# Altium PCB hazi_kiindulas.PcbDoc
Units mil, origin at the board's own origin, x right, y up, seen from the top; angles counter-clockwise.
Board outline 3550 x 2716.54 mil, 2 copper layers (Top Layer, Bottom Layer); 75 components, 66 nets, 307 pads, 24 vias.
Unrouted connection lines stored in the file: 1.
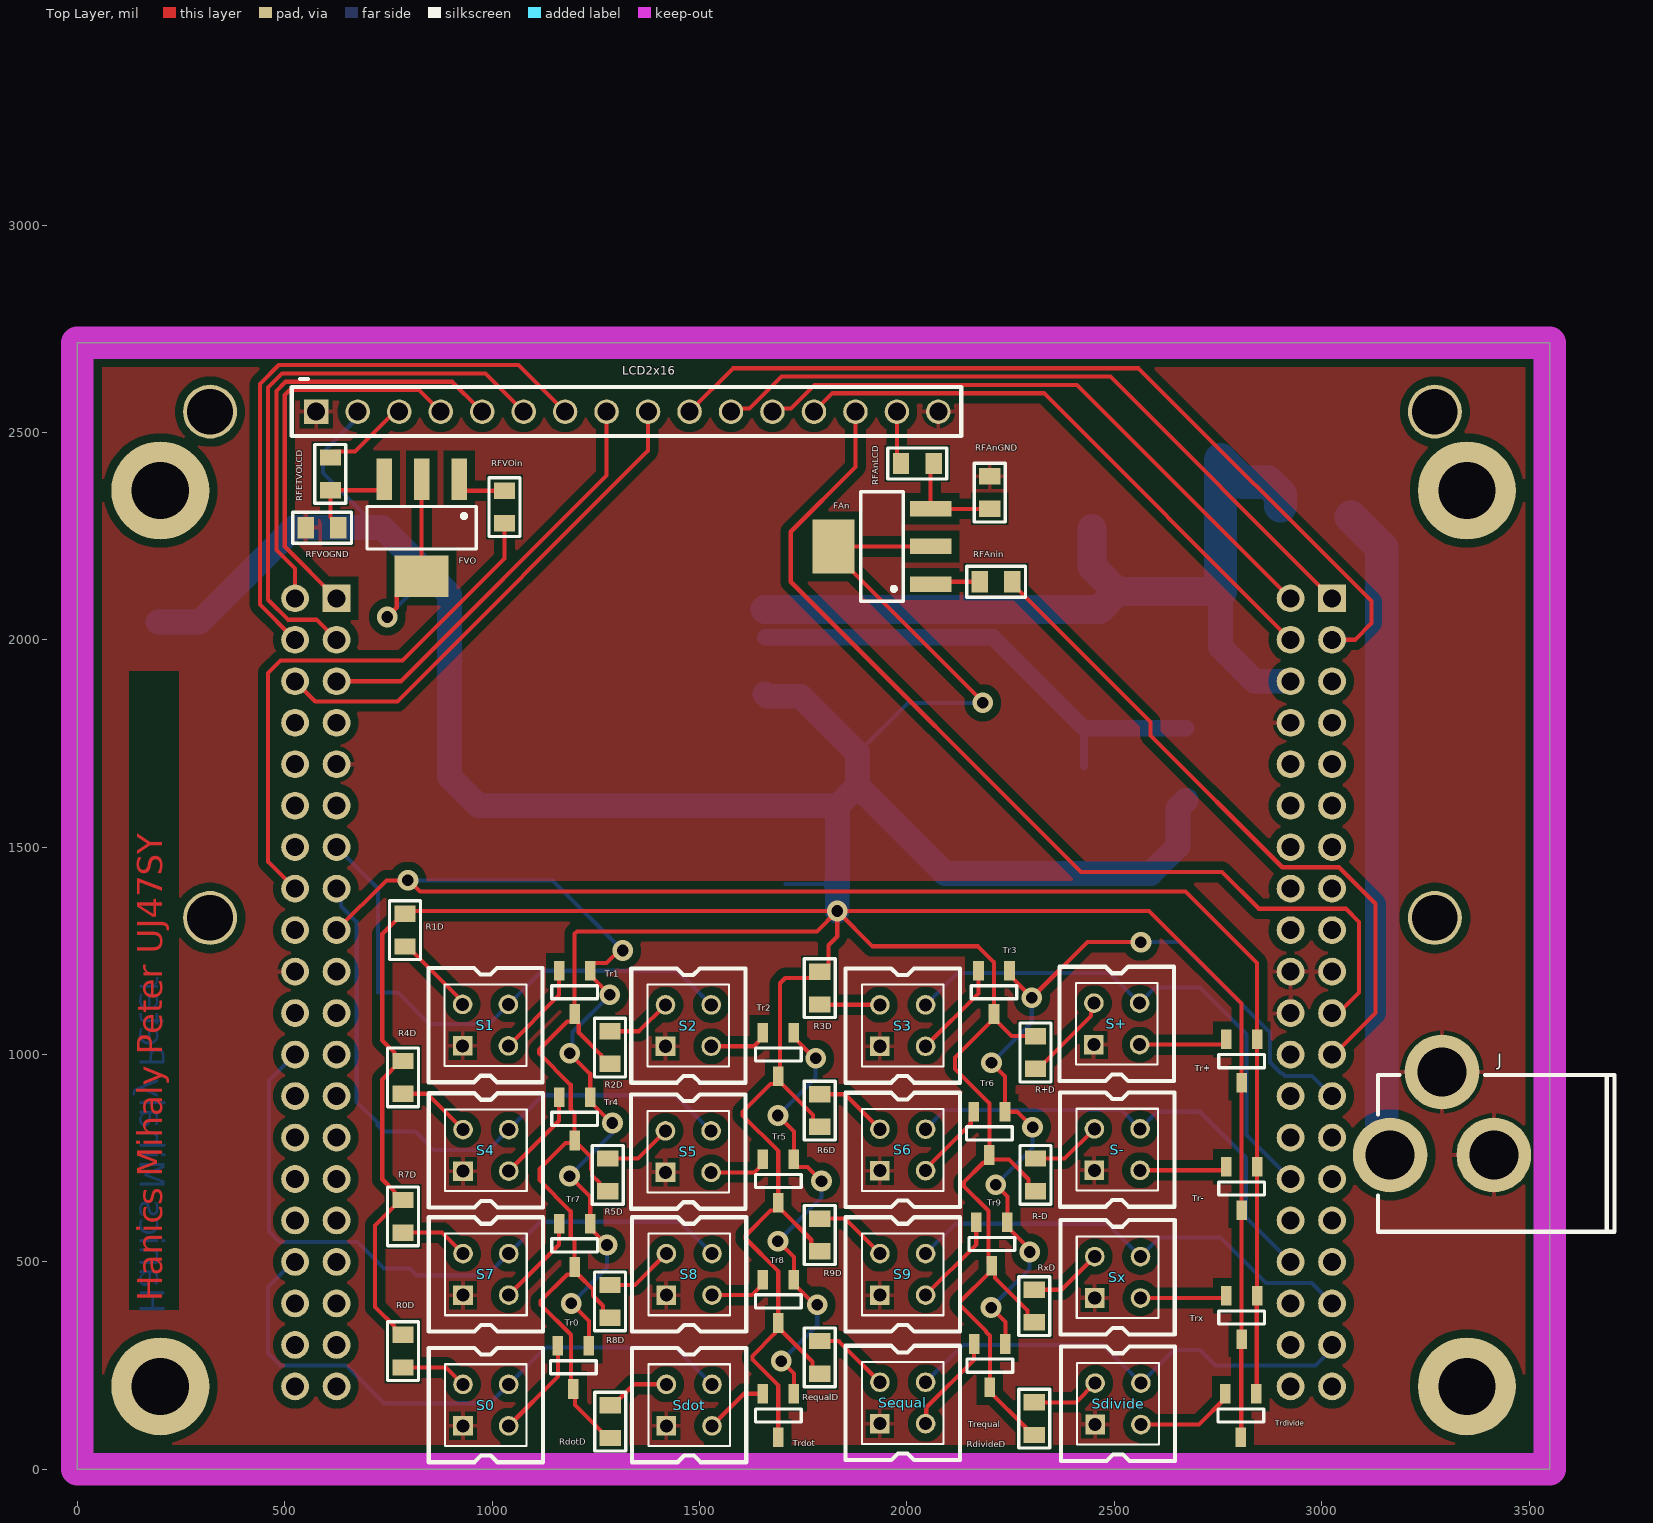
[diagram p0: Top Layer view]
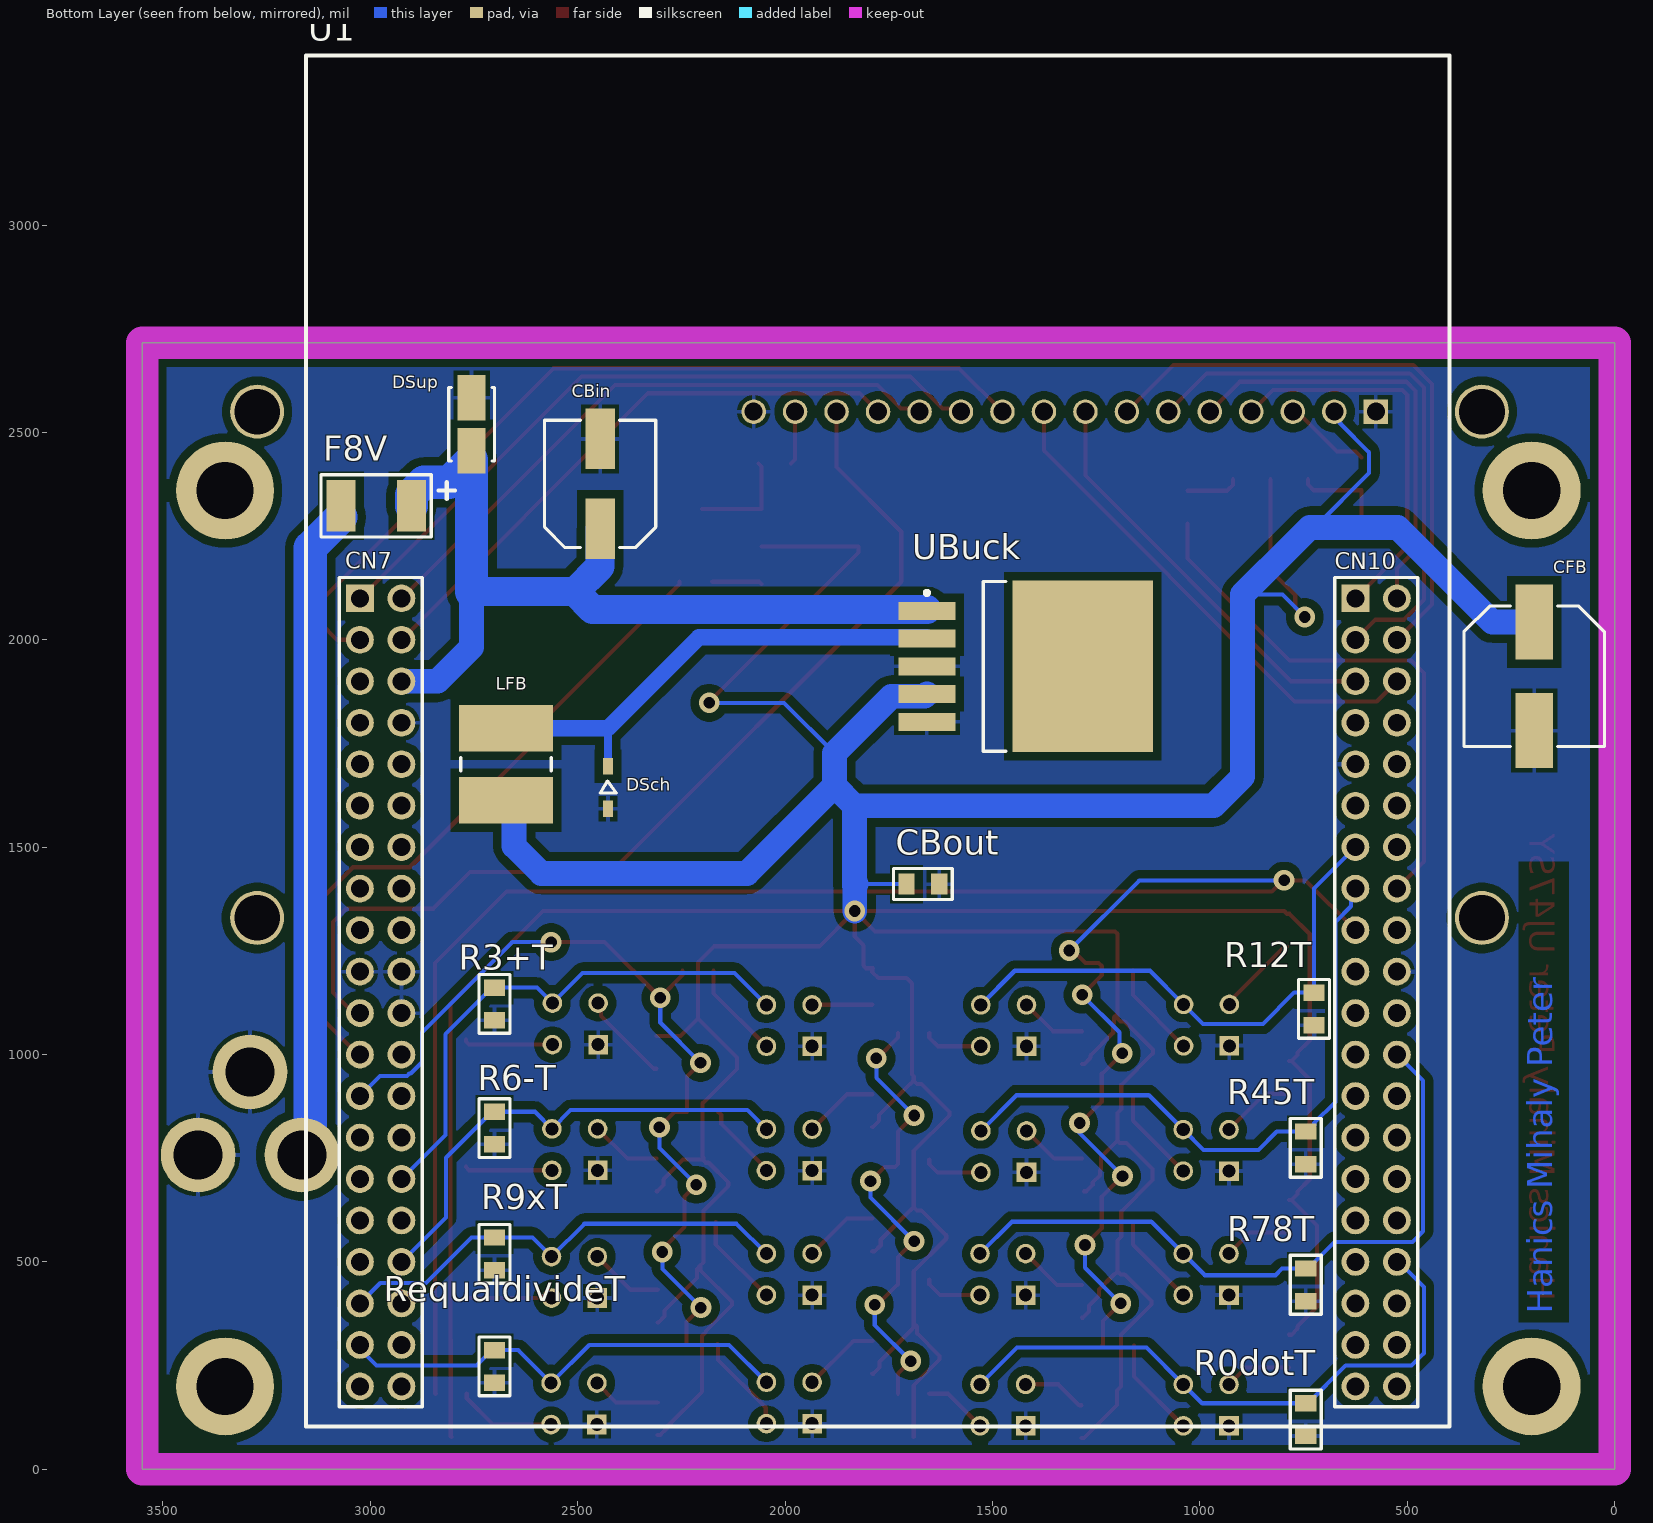
[diagram p1: Bottom Layer view, seen from below]
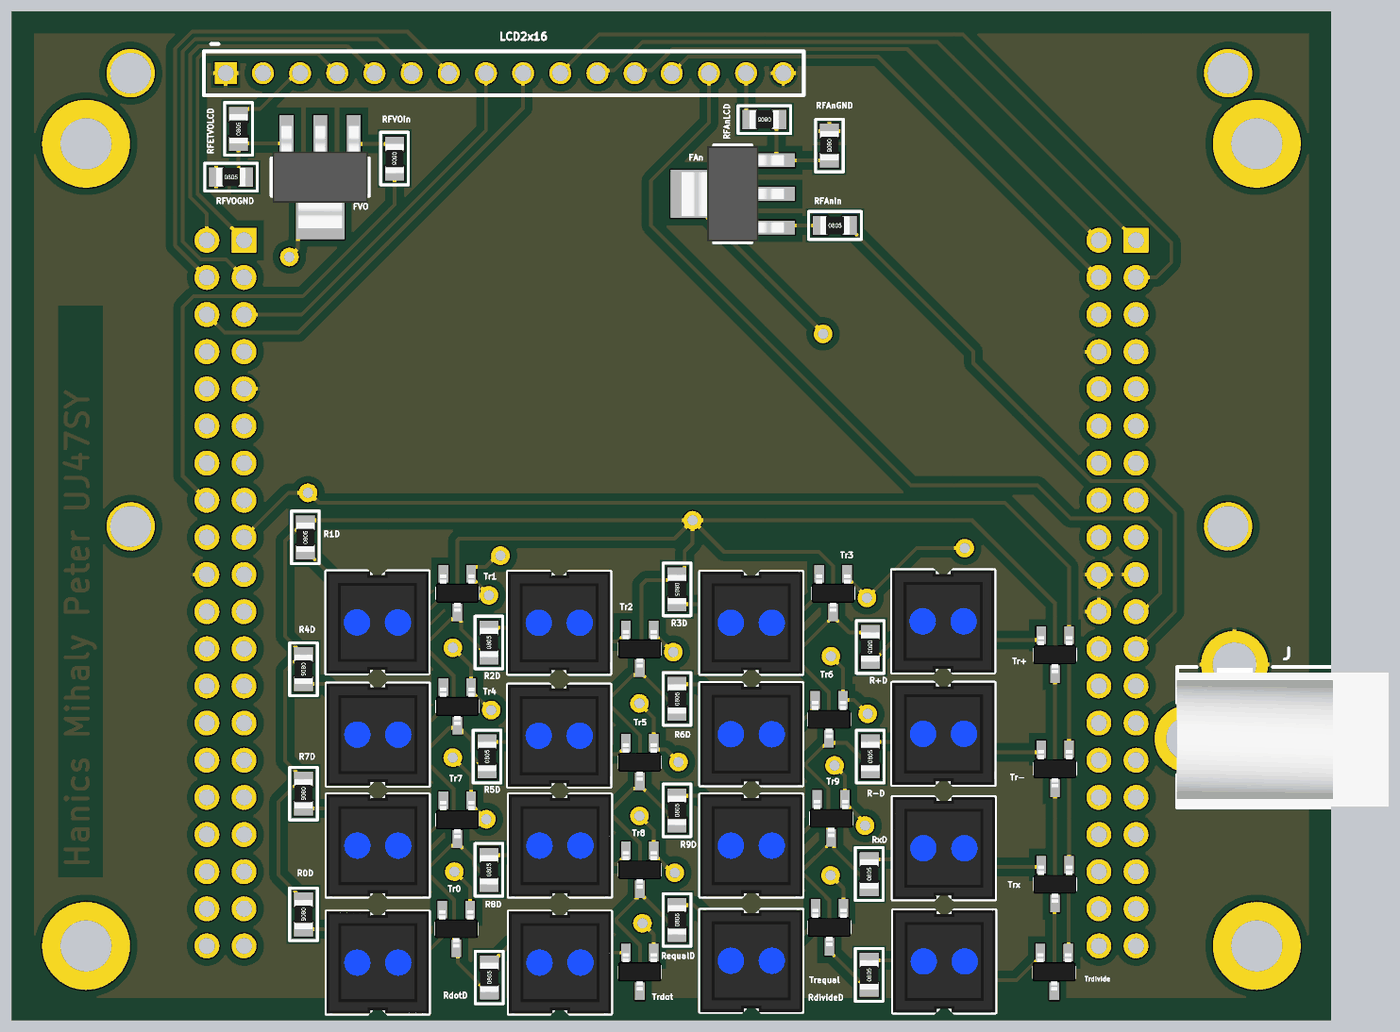
[diagram p2: 3D render of the assembled board from above, using the file's embedded part models]
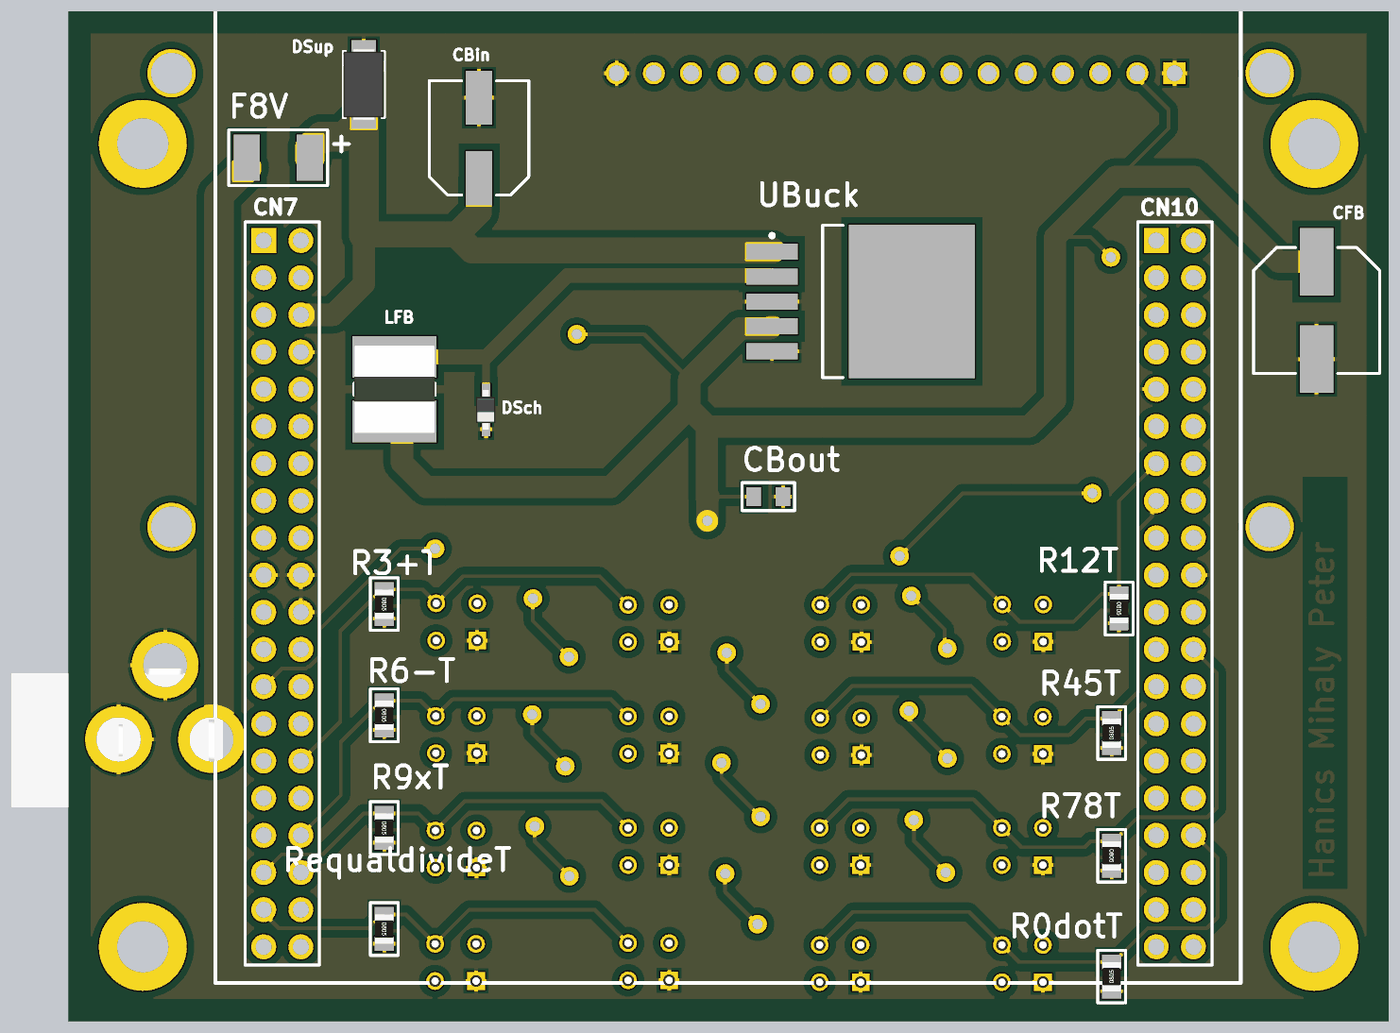
[diagram p3: 3D render of the assembled board from below, using the file's embedded part models]

## Layer stack, top to bottom
Top Solder: solder mask 0.4, Solder Resist, Dk 3.5
Top Layer: signal copper 1.4
Dielectric 1: dielectric 12.6, FR-4, Dk 4.8
Bottom Layer: signal copper 1.4
Bottom Solder: solder mask 0.4, Solder Resist, Dk 3.5

## Board outline
0,0 0,2716.54 3550,2716.54 3550,0

## Design rules (kind name [scope] priority, off if disabled: settings)
Clearance [All] p1: gap=10 ignorepadtopadclearanceinfootprint=FALSE except(0: Arc-Hole Track-Hole SMDPad-Hole THPad-Hole Via-Hole Fill-Hole Poly-Hole Region-Hole Text-Hole; 20: Arc-Poly Track-Poly SMDPad-Poly THPad-Poly Via-Poly Fill-Poly Poly-Poly)
HoleSize [All] p1: absolutevalues=TRUE maxlimit=196.85 minlimit=1 maxpercent=80.000 minpercent=20.000
PolygonConnect [All] p1: connectstyle=Relief reliefconductorwidth=10 reliefentries=4 polygonreliefangle="90 Angle" airgapwidth=10
RoutingVias [All] p1: holewidth=28 width=50 viastyle="Through Hole" minholewidth=28 minwidth=50 maxholewidth=28 maxwidth=50
SolderMaskExpansion [All] p1: expansion=4 istentingtop=FALSE
Width [All] p1: maxlimit=100 minlimit=10 preferedwidth=10
29 further rules are at their usual default settings.

## Components (designator, comment, footprint, x,y, rotation, side; value= is the part's Value field where it differs from the comment)
CBin "100uF" CAP_100uF_ELKO 2446,2376 r90 bottom
CBout "100nF" FP_0805_CAP_085 1668,1411 r0 bottom
CFB "1000uF" CAP_Elko1000uF 194,1912 r270 bottom
DSch "SCHOTTKY" FP_SOD323-F 2400.43,1679.25 r0 bottom
DSup "" DiodeSMAJ5A 2755.91,2519.68 r90 bottom
F8V "Fuse" FP_MULTIFUSE 3070.87,2322.83 r180 bottom
FAn "NMOS" FP_SOT223 1940,2225 r180 top
FVO "NMOS" FP_SOT223 830,2270 r270 top
J "2.xmm" FP_DC_TAP_ANYA 3165,758 r270 top
LCD2x16 "LCD" FP_LCD2X16curr 575.91,2550 r0 top
LFB "100uHy" IND100uHy 2673,1700 r270 bottom
R0D "220R" FP_0805_RES 785,285 r270 top
R0dotT "22k" FP_0805_RES 745,120 r90 bottom
R1D "220R" FP_0805_RES 790,1300 r90 top
R2D "220R" FP_0805_RES 1284,1017 r90 top
R3+T "22k" FP_0805_RES 2700.79,1122.05 r270 bottom
R3D "220R" FP_0805_RES 1790,1160 r270 top
R4D "220R" FP_0805_RES 785,945 r270 top
R5D "220R" FP_0805_RES 1279,710 r90 top
R6-T "22k" FP_0805_RES 2700.79,822.83 r270 bottom
R6D "220R" FP_0805_RES 1790,865 r90 top
R7D "220R" FP_0805_RES 785,610 r270 top
R8D "220R" FP_0805_RES 1284,405 r90 top
R9D "220R" FP_0805_RES 1790,565 r90 top
R9xT "22k" FP_0805_RES 2700.79,519.68 r270 bottom
R12T "22k" FP_0805_RES 725,1110 r270 bottom
R45T "22k" FP_0805_RES 745,775 r90 bottom
R78T "22k" FP_0805_RES 745,445 r270 bottom
R+D "220R" FP_0805_RES 2310,1005 r270 top
R-D "220R" FP_0805_RES 2310,710 r90 top
RdivideD "220R" FP_0805_RES 2307.09,122.05 r90 top
RdotD "220R" FP_0805_RES 1285,115 r90 top
RequalD "220R" FP_0805_RES 1790,270 r90 top
RequaldivideT "22k" FP_0805_RES 2700.79,248.03 r270 bottom
RFAnGND "220R" FP_0805_RES 2200,2355 r270 top
RFAnin "220R" FP_0805_RES 2215,2140 r0 top
RFAnLCD "220R" FP_0805_RES 2025,2425 r180 top
RFETVOLCD "220R" FP_0805_RES 610,2400 r90 top
RFVOGND "220R" FP_0805_RES 590,2270 r0 top
RFVOin "220R" FP_0805_RES 1030,2320 r270 top
RxD "220R" FP_0805_RES 2307.09,393.7 r90 top
S0 "CNY70" CNY70 984.88,155 r0 top
S1 "CNY70" CNY70 984,1071 r0 top
S2 "CNY70" CNY70 1473.12,1070 r0 top
S3 "CNY70" CNY70 1989.88,1070 r0 top
S4 "CNY70" CNY70 985,769 r0 top
S5 "CNY70" CNY70 1473,766 r0 top
S6 "CNY70" CNY70 1990,770 r0 top
S7 "CNY70" CNY70 985,470 r0 top
S8 "CNY70" CNY70 1475,470 r0 top
S9 "CNY70" CNY70 1990,470 r0 top
S+ "CNY70" CNY70 2506,1074 r0 top
S- "CNY70" CNY70 2507,771 r0 top
Sdivide "CNY70" CNY70 2509,158 r0 top
Sdot "CNY70" CNY70 1475,155 r0 top
Sequal "CNY70" CNY70 1990,160 r0 top
Sx "CNY70" CNY70 2508,463 r0 top
Tr0 "BC817" FP_SOT23-3 1196,246 r90 top
Tr1 "BC817" FP_SOT23-3 1199,1150 r90 top
Tr2 "BC817" FP_SOT23-3 1690,1000 r90 top
Tr3 "BC817" FP_SOT23-3 2210,1150 r90 top
Tr4 "BC817" FP_SOT23-3 1199,845 r90 top
Tr5 "BC817" FP_SOT23-3 1690,695 r90 top
Tr6 "BC817" FP_SOT23-3 2199,810 r90 top
Tr7 "BC817" FP_SOT23-3 1199,540 r90 top
Tr8 "BC817" FP_SOT23-3 1690,405 r90 top
Tr9 "BC817" FP_SOT23-3 2204.72,543.31 r90 top
Tr+ "BC817" FP_SOT23-3 2807.09,984.25 r90 top
Tr- "BC817" FP_SOT23-3 2807.09,677.17 r90 top
Trdivide "BC817" FP_SOT23-3 2805,130 r90 top
Trdot "BC817" FP_SOT23-3 1690,130 r90 top
Trequal "BC817" FP_SOT23-3 2200,250 r90 top
Trx "BC817" FP_SOT23-3 2807.09,366.14 r90 top
U1 "NUCLEO-F446RE" FP_NUCLEO-64 3025,2100 r180 bottom locked
UBuck "LM2576S-3.3" TS5B_M 1420,1936 r180 bottom

## Footprints (in the part's own frame and the unit in brackets; to place one, negate y for a bottom-side part, rotate by r counter-clockwise, add the part's x,y. Pads: shape width x height; smd on the part's side, far side on the other; paste and mask are expansions set on the pad)
CAP_100uF_ELKO [mm] "Aluminum Electrolytic Capacitor, Body 7,10x6,60x5,70mm, IPC Low Density"
  rect 3.7x1.8 smd: 1(-2.75,0) 2(2.75,0)
  silkscreen extent -3.9,-3.4 3.9,3.4, body extent -3.9,-3.4 3.9,3.4, height 5.7
CAP_Elko1000uF [mm] "Aluminum Electrolytic Capacitor, Body 8,40x8,40x11,00mm, IPC Low Density"
  rect 4.6x2.3 smd: 1(-3.325,0) 2(3.325,0)
  silkscreen extent -4.3,-4.3 4.3,4.3, body extent -4.3,-4.3 4.3,4.3, height 11
CNY70 [mm]
  round 1.2 hole 0.8: A(-1.4,1.27) C(1.4,-1.27) E(1.4,1.27)
  rect 1.2x1.2 hole 0.8: K(-1.4,-1.27)
  silkscreen extent -3.5,-3.5 3.5,3.5, body extent -3.5,-3.5 3.5,3.5, height 6.02
DiodeSMAJ5A [mm] "Molded Capacitor, 2-Leads, Body 4,25x2,67mm, IPC Low Density"
  rect 2.8x1.7 smd: 1(-1.625,0) 2(1.625,0)
  silkscreen extent -4.57,-1.4 2.25,2.03, body extent -2.47,-1.4 2.47,1.4, height 2.29
FP_0805_CAP_085 [mm] "0805 kapacitás YAGEO 0.85mm magas"
  rect 1x1.3 smd: 1(-1,0) 2(1,0)
  silkscreen extent -1.8,-0.95 1.8,0.95, body extent -1,-0.64 1.03,0.64, height 0.85
FP_0805_RES [mm] "0805 ellenállás"
  rect 1x1.3 smd: 1(-1,0) 2(1,0)
  silkscreen extent -1.8,-0.95 1.8,0.95, body extent -1,-0.62 1,0.63, height 0.62
FP_DC_TAP_ANYA [mil] "DC HEBA25 TÁPFESZÜLTSÉG ALJZAT ZÁRT, NYÁKBA 90°"
  round 180 hole 118: 1(0,0) 2(0,250) 3(-200,125)
  silkscreen extent -193,-30 185,541, body extent -190,-31 183,539, height 440
FP_LCD2X16curr [mm]
  rect 1.5x1.5 hole 1.1: 1(0,0)
  round 1.5 hole 1.1: 2(2.54,0) 3(5.08,0) 4(7.62,0) 5(10.16,0) 6(12.7,0) 7(15.24,0) 8(17.78,0) 9(20.32,0) 10(22.86,0) 11(25.4,0) 12(27.94,0) 13(30.48,0) 14(33.02,0) 15(35.56,0) 16(38.1,0)
  round 3.3 hole 2.8: ""(-6.5,-31) ""(-6.5,0) ""(68.5,-31) ""(68.5,0)
  silkscreen extent -1.5,-1.5 39.5,2, body extent -9,-33.5 70.5,2.3, height 17.5
FP_MULTIFUSE [mm] "POLYFUSE SMD 1812"
  rect 1.78x3.15 smd: 1(0,0) 2(4.318,0)
  silkscreen extent -1.22,-1.9 5.53,1.9, body extent -0.12,-1.71 4.57,1.71, height 1
FP_NUCLEO-64 [mm]
  round 1.7 hole 1.1: 0(0,-48.26) 0(2.54,-48.26) 0(60.96,-48.26) 0(63.5,-48.26) 2(2.54,0) 3(0,-2.54) 4(2.54,-2.54) 5(0,-5.08) 6(2.54,-5.08) 7(0,-7.62) 8(2.54,-7.62) 9(0,-10.16) 10(2.54,-10.16) 11(0,-12.7) 12(2.54,-12.7) 13(0,-15.24) 14(2.54,-15.24) 15(0,-17.78) 16(2.54,-17.78) 17(0,-20.32) 18(2.54,-20.32) 19(0,-22.86) 20(2.54,-22.86) 21(0,-25.4) 22(2.54,-25.4) 23(0,-27.94) 24(2.54,-27.94) 25(0,-30.48) 26(2.54,-30.48) 27(0,-33.02) 28(2.54,-33.02) 29(0,-35.56) 30(2.54,-35.56) 31(0,-38.1) 32(2.54,-38.1) 33(0,-40.64) 34(2.54,-40.64) 35(0,-43.18) 36(2.54,-43.18) 37(0,-45.72) 38(2.54,-45.72) 40(63.5,0) 41(60.96,-2.54) 42(63.5,-2.54) 43(60.96,-5.08) 44(63.5,-5.08) 45(60.96,-7.62) 46(63.5,-7.62) 47(60.96,-10.16) 48(63.5,-10.16) 49(60.96,-12.7) 50(63.5,-12.7) 51(60.96,-15.24) 52(63.5,-15.24) 53(60.96,-17.78) 54(63.5,-17.78) 55(60.96,-20.32) 56(63.5,-20.32) 57(60.96,-22.86) 58(63.5,-22.86) 59(60.96,-25.4) 60(63.5,-25.4) 61(60.96,-27.94) 62(63.5,-27.94) 63(60.96,-30.48) 64(63.5,-30.48) 65(60.96,-33.02) 66(63.5,-33.02) 67(60.96,-35.56) 68(63.5,-35.56) 69(60.96,-38.1) 70(63.5,-38.1) 71(60.96,-40.64) 72(63.5,-40.64) 73(60.96,-43.18) 74(63.5,-43.18) 75(60.96,-45.72) 76(63.5,-45.72)
  rect 1.7x1.7 hole 1.1: 1(0,0) 39(60.96,0)
  silkscreen extent -3.3,-50.72 66.72,33.25, body extent -3.3,-50.72 66.72,33.25, height 11
FP_SOD323-F [mm] "SOD323-F (SC-90)"
  rect 0.6x1 smd: 1(0.675,2.2) 2(0.675,-0.4)
  silkscreen extent 0.18,0.51 1.15,1.23, body extent 0.02,-0.46 1.37,2.24, height 0.79
FP_SOT23-3 [mm] "SOT23-3 tok"
  rect 1.2x0.65 smd: 1(1.327,-0.95) 2(1.327,0.95) 3(-1.327,0)
  silkscreen extent -0.4,-1.4 0.4,1.4, body extent -1.27,-1.46 1.27,1.46, height 0.97
FP_SOT223 [mm] "SOT223 package, 3 leads"
  rect 2.55x0.95 smd: 1(-2.975,2.3) 2(-2.975,0) 3(-2.975,-2.3)
  rect 2.55x3.3 smd: 2(2.975,0)
  silkscreen extent -1.3,-3.35 1.3,3.35, body extent -3.5,-3.25 3.5,3.25, height 1.65
IND100uHy [mm] "Chip Inductor, 2-Leads, Body 6,00x5,50mm, IPC Low Density"
  rect 2.85x5.74 smd: 1(-2.205,0) 2(2.205,0)
  silkscreen extent -0.4,-2.77 0.4,2.77, body extent -3,-2.75 3,2.75, height 4.8
TS5B_M [mm] "D2-PAK, 6-Leads, Body 8.6x10.2mm, Pitch 1.7mm, Lead Span 14.1mm, IPC Low Density"
  rect 3.5x1.1 smd: 1(-6.05,3.4) 2(-6.05,1.7) 3(-6.05,0) 4(-6.05,-1.7) 5(-6.05,-3.4)
  rect 8.6x10.5 smd: 6(3.5,0)
  silkscreen extent -6.18,-5.2 -1.2,5.2, body extent -2.6,-5.2 6.29,5.2, height 4.65

## Part data
CBin: library part CAP100uF, "100uF Capacitor", Tolerance=20%, Voltage=16V, Name="Electrolytic capacitor", Reference=91-00-20, Supplier=Lomex
CBout: library part CAP, "Capacitor", Tolerance=10%, Voltage=50V, Name="Capacitor 100nF", Reference=82-13-46, Supplier=Lomex
CFB: library part CAP1000uF, "1000uF Capacitor", Tolerance=20%, Voltage=6.3V, Name="Electrolytic Capacitor", Reference=91-01-03, Supplier=Lomex
DSch: "Schottky diode", Name="Catch Diode (Schottky)", Reference=83-01-41, Supplier=Lomex
DSup: library part SMAJ5A, "Suppressor Diode", Name=SMAJ5A, Reference=96-00-75, Supplier=Lomex, V_R=5
FAn FVO: "NXP - BSP030,115 - MOSFET, N CH, 30V, 10A, SOT223", Name="BSP89 NMOS 240V 0.35A Small Signal FET", Reference=86-01-40, Supplier=Lomex
J: library part DC_TAP_ANYA, "2.xmm DC HEBA25 TÁPFESZÜLTSÉG ALJZAT ZÁRT, NYÁKBA 90°", Name="TÁP DC ANYA 5.5/2.1/9.5mm DCS-5521-5", Reference=43-07-67, Supplier=Lomex
LCD2x16: library part LCD1602, "16x2 LCD", Name="ERM1602SBS-6 _ 3.3V", Reference=BUY030, Supplier=ChipCAD
LFB: library part IND100uH, "100uH Inductor", Tolerance=10%, Imax=0.52A, Name="Power Inductor", Reference=93-02-83, Supplier=Lomex
R0D R0dotT R1D R2D R3+T R3D R4D R5D R6-T R6D R7D R8D R9D R9xT R12T R45T R78T R+D R-D RdivideD RdotD RequalD RequaldivideT RFAnGND RFAnin RFAnLCD RFETVOLCD RFVOGND RFVOin RxD: library part RES, "Resistor", Power=0.125W, Tolerance=1%, Supplier=Lomex
  R0D R1D R2D R3D R4D R5D R6D R7D R8D R9D R+D R-D RdivideD RdotD RequalD RFAnGND RFAnin RFAnLCD RFETVOLCD RFVOGND RFVOin RxD: Name=CR-05FL7--220R, Reference=80-10-78
  R0dotT R3+T R6-T R9xT R12T R45T R78T RequaldivideT: Name=CR-05FL7---22k, Reference=80-11-02
S0 S1 S2 S3 S4 S5 S6 S7 S8 S9 S+ S- Sdivide Sdot Sequal Sx: "Reflective Optical Sensor", Name=CNY70, Reference=38-00-43, Supplier=Lomex
Tr0 Tr1 Tr2 Tr3 Tr4 Tr5 Tr6 Tr7 Tr8 Tr9 Tr+ Tr- Trdivide Trdot Trequal Trx: "NPN General-purpose Transistor", ComponentLink1Description="Manufacturer Link", ComponentLink1URL=http://www.semiconductors.philips.com/, ComponentLink2Description=Datasheet, ComponentLink2URL=http://www.semiconductors.philips.com/acrobat/datasheets/BC817_BC817W_BC337_5.pdf, Name=BJT, Reference=86-01-94, Supplier=Lomex
UBuck: library part CMP-0069-00113-2, "SIMPLE SWITCHER® 3A Step-Down Voltage Regulator, 5-pin TO-263", Manufacturer="National Semiconductor", PackageTopMarking="NSUZXYTTE#*LM2576S*-3.3 P+", PowerWise=N, Code_JEDEC=MO-169-AB, ComponentLink1Description="LM2576 Datasheet", ComponentLink1URL=http://www.national.com/ds/LM/LM2576.pdf, ComponentLink2Description="LM2576 Web Page", ComponentLink2URL=http://www.national.com/pf/LM/LM2576.html, ComponentLink3Description="TS5B Package Page", ComponentLink3URL=http://www.national.com/packaging/folders/ts5b.html, CompType=Switcher, DatasheetVersion=Aug-2004, Name="Step down regulator", PackageDescription="TO-263, Molded, .400 x .390 x .180in, 5 Lead, .067in Pitch, Surface Mount", PackageReference=TS5B, PackageVersion="revD, Apr-2005", PinCount=5, Reference=89-21-81, RevisionNote="Component URLs added", RoHS=N, Supplier=Lomex
F8V: Name="Polyfuse 8V 2.6A SMD 1812", Reference=44-04-73, Supplier=Lomex
U1: Name="Nucleo F446RE", Reference=NUCLEO, Supplier=Tanszék

## Free pads (board coordinates)
  round 236.22 hole 137.8: ""(200,200) ""(200,2360) ""(3350,200) ""(3350,2360)

## Via types
v1: diameter 50, hole 28, Top Layer to Bottom Layer, 24 vias

## Nets (pads, with @x,y where several pads share a name; then routed paths per layer and width w, separated by ;. In a path a pad name is that pad's centre, name@x,y a point inside that pad or via, vN(x,y) a via of type N, cw(c..) or ccw(c..) an arc to the next point about the centre after c; other vN are vias at no path point)
3.3V: CBout.2 CFB.1 FAn.2 FVO.2 LCD2x16.2 LFB.2 R0D.1 R1D.2 R2D.1 R3D.1 R4D.1 R5D.1 R6D.1 R7D.1 R8D.1 R9D.1 R+D.1 R-D.1 RdivideD.1 RdotD.1 RequalD.1 RxD.1 Tr0.3 Tr1.3 Tr2.3 Tr3.3 Tr4.3 Tr5.3 Tr6.3 Tr7.3 Tr8.3 Tr9.3 Tr+.3 Tr-.3 Trdivide.3 Trdot.3 Trequal.3 Trx.3 UBuck.4 | length 17367.2
  Top Layer w10: v1(747,2055) 770.04,2078.04 770.04,2107.68 815.24,2152.87 830,2152.87 FVO.2@830,2387.13 ; R0D.1 779.09,324.37 764.41,339.06 764.41,344.96 718,391.37 718,588.28 R7D.1@779.09,649.37 ; R7D.1 R7D.1@779.09,649.37 ; R4D.1 R4D.1@779.09,984.37 ; R5D.1 1273.09,670.63 1258.41,685.32 1258.41,691.22 1241.13,708.5 1241.13,720.76 1238.41,723.47 1238.41,753.35 Tr4.3 ; R8D.1 1282.11,365.63 1267.42,380.32 1267.42,394.46 1243.41,418.47 1243.41,433.35 1207.62,469.13 1206.8,469.13 1199,476.93 Tr7.3@1199,477.76 ; R2D.1 1278.09,977.63 1263.41,992.32 1263.41,998.22 1209,1052.63 1209,1073.28 1206.8,1075.48 1206.8,1089.96 Tr1.3 ; RdotD.1 1279.09,75.63 1200,154.72 1200,189.76 Tr0.3 1190,199.76 1190,324.47 1117,397.47 1117,405.76 1181.2,469.96 1191.2,469.96 Tr7.3@1199,477.76 ; Trdot.3 1690,202.47 1627.38,265.09 1627.38,273.38 1682.2,328.2 1682.2,344.96 Tr8.3 ; RequalD.1 1787.23,230.63 1772.54,245.32 1772.54,259.46 1697.87,334.13 1697.8,334.13 1690,341.93 Tr8.3 ; R9D.1 1784.09,525.63 1769.41,540.32 1769.41,553.59 1698.87,624.13 1697.8,624.13 Tr5.3@1690,631.93 ; R6D.1 1788.23,825.63 1773.54,840.32 1773.54,854.46 1758.32,869.68 1758.2,869.68 1749.41,878.47 1749.41,878.59 1698.87,929.13 1697.8,929.13 Tr2.3@1690,936.93 ; FAn.2@2057.13,2225 1822.87,2225 1822.87,2210.24 2183,1850.11 v1(2183,1848) ; Tr6.3@2196.88,751.44 2196.88,744.81 2191.2,739.13 2184.13,739.13 2136.89,691.89 2136.89,683.61 2197,623.5 2197,498.79 Tr9.3 ; RdivideD.1 2301.18,82.68 2286.5,97.36 2286.5,100.43 2200,186.93 Trequal.3 2200,322 2190.39,331.61 2190.39,333.61 2128.14,395.86 2128.14,404.14 2162.29,438.29 2162.78,438.29 2204.72,480.24 Tr9.3 ; RxD.1 2305.2,354.33 2290.51,369.02 2290.51,383.16 2212.52,461.15 2212.52,483.27 Tr9.3 ; R-D.1 2308.11,670.63 2293.42,685.32 2293.42,699.46 2263.75,729.13 2245.94,746.93 2199,746.93 Tr6.3 2199,882.47 2116,965.47 2116,992.93 Tr3.3@2210,1086.93 ; R+D.1 2252.56,1044.37 Tr3.3@2210,1086.93 ; Trdivide.3 2806.04,78.8 2806.04,312.85 Trx.3 Tr-.3 Tr+.3 2807.09,1122.91 2584,1346 v1(1832,1346) ; R7D.1@779.09,649.37 764.41,664.06 764.41,669.96 735,699.37 735,940.28 R4D.1@779.09,984.37 ; R4D.1@779.09,984.37 764.41,999.06 764.41,1004.96 735,1034.37 735,1290.28 784.09,1339.37 R1D.2 796.63,1346 v1(1832,1346) ; Tr7.3@1199,477.76 Tr7.3 1199,552 1189.39,561.6 1189.39,622.08 1114,697.47 1114,724 1177.06,787.06 1193.31,787.06 Tr4.3 ; Tr4.3 1199,858.75 1189.39,868.35 1189.39,927.08 1113.17,1003.3 1113.17,1011.59 1181.2,1079.62 1191.2,1079.62 1199,1087.42 Tr1.3 ; Tr1.3 1199,1291.14 1204.86,1297 1783,1297 v1(1832,1346) ; Tr8.3 1690,477.47 1611.5,555.97 1611.5,564.26 1671.38,624.13 1682.2,624.13 Tr5.3@1690,631.93 ; Tr5.3@1690,631.93 1690,767.47 1604,853.47 1604,861.76 1671.38,929.13 1682.2,929.13 Tr2.3@1690,936.93 ; Tr2.3@1690,936.93 Tr2.3 ; Tr2.3@1690,936.93 Tr2.3 ; Tr2.3 1694,951.76 1694,1172 1706.68,1184.68 1775.31,1184.68 R3D.1 1790,1206 1788,1208 1804.54,1208 1810.59,1214.06 1810.59,1263.59 1832,1285 v1(1832,1346) ; v1(1832,1346) 1917,1261 2171.47,1261 2210,1222.47 Tr3.3 Tr3.3@2210,1086.93
  Bottom Layer w10: LCD2x16.2 675.91,2536.73 661.47,2522.29 661.47,2521.47 592,2452 592,2402 723,2271 ; v1(747,2055) 801,2109 897,2109 ; CBout.2 1829,1411 ; 1832,1408 1833,1407 ; 1881,1726.45 2002.55,1848 v1(2183,1848)
  Bottom Layer w60: CFB.1 294.91,2042.91 523,2271 723,2271 735,2271 768.98,2237.02 897,2109 897,1670 967,1600 1833,1600 ; UBuck.4 1663.46,1863.8 1743.66,1863.8 1881,1726.45 1881,1648 ; 1829,1411 1832,1408 v1(1832,1346) ; 1833,1407 1833,1600 ; LFB.2 2653.23,1593.42 2653.23,1502.23 2588,1437 2092,1437 1881,1648 ; 1833,1600 1881,1648
5V: CBin.1 DSup.1 F8V.2 U1.6 UBuck.1 | length 2176.2
  Bottom Layer w10: DSup.1@2755.91,2434.06 DSup.1
  Bottom Layer w60: 2755.91,2115.91 2755.91,1982.09 2838,1900 U1.6
  Bottom Layer w70: UBuck.1@1658.19,2073 2464.19,2073 2507.09,2115.91 ; CBin.1 2446.43,2267.3 2446.43,2176.57 2507.09,2115.91 ; 2755.91,2115.91 2507.09,2115.91
  Bottom Layer w80: 2755.91,2115.91 2755.91,2434.06 2810.12,2379.84 2870.83,2379.84 2900.87,2349.8 F8V.2
A: LCD2x16.15 RFAnLCD.2 | length 129
  Top Layer w10: LCD2x16.15 1975.92,2434.71 RFAnLCD.2
AnodePWM: RFAnin.2 U1.23 | length 1629.4
  Top Layer w10: RFAnin.2 2254.37,2134.09 2586.99,1801.47 2586.99,1769.47 2904.93,1451.54 3042,1451.54 3130,1363.54 3130,1100 3030,1000 U1.23
DB0: LCD2x16.7 U1.42 | length 1456
  Top Layer w10: U1.42 520,2000 520,2005 440,2085 440,2616.57 485.6,2662.17 1063.74,2662.17 LCD2x16.7
DB1: LCD2x16.8 U1.43 | length 1010.4
  Top Layer w10: U1.43 780,1900 1275.91,2395.91 LCD2x16.8
DB2: LCD2x16.9 U1.44 | length 1215.4
  Top Layer w10: U1.44 573.46,1851.54 771.54,1851.54 1375.91,2455.91 LCD2x16.9
DB3: LCD2x16.10 U1.3 | length 2084.6
  Top Layer w10: LCD2x16.10 1580.44,2654.52 2558.62,2654.52 3120,2093.14 3120,2040 3080,2000 U1.3
DB4: LCD2x16.11 U1.1 | length 1705.5
  Top Layer w10: LCD2x16.11 1583.41,2557.49 1620.44,2557.49 1697.46,2634.52 2490.48,2634.52 U1.1
DB5: LCD2x16.12 U1.2 | length 1488.9
  Top Layer w10: LCD2x16.12 1683.4,2557.49 1720.44,2557.49 1777.47,2614.52 2410.48,2614.52 U1.2
DB6: LCD2x16.13 U1.4 | length 1413.8
  Top Layer w10: LCD2x16.13 1820.44,2594.52 2330.48,2594.52 U1.4
DB7: LCD2x16.14 U1.21 | length 2440.2
  Top Layer w10: LCD2x16.14 1875.92,2416.32 1720,2260.4 1720,2140 2420,1440 2760,1440 2848.46,1351.54 3058.46,1351.54 3090,1320 3090,1149.6 3040.4,1100 U1.21
E: LCD2x16.6 U1.41 | length 1379.8
  Top Layer w10: U1.41 576.54,2048.46 508,2048.46 460,2096.46 460,2608.28 493.88,2642.17 983.74,2642.17 1065.9,2560.01 LCD2x16.6@1074.99,2560.01
GND: CBin.2 CBout.1 CFB.2 DSch.1 DSup.2 J.2 J.3 LCD2x16.1 LCD2x16.16 R0dotT.1 R3+T.2 R6-T.2 R9xT.2 R12T.2 R45T.1 R78T.2 RequaldivideT.2 RFAnGND.1 RFVOGND.1 S0.K S1.K S2.K S3.K S4.K S5.K S6.K S7.K S8.K S9.K S+.K S-.K Sdivide.K Sdot.K Sequal.K Sx.K U1.8 U1.19 U1.20 U1.22 U1.47 U1.58 UBuck.3 UBuck.5
IRS0dot: R0dotT.2 S0.E Sdot.E U1.72 | length 1462.6
  Bottom Layer w10: U1.72 520,500 460,440 460,280 490,250 648.46,250 739.09,159.37 R0dotT.2 994.37,159.37 S0.E 1129,294 1441.12,294 Sdot.E
IRS3+: R3+T.1 S3.E S+.E U1.30 | length 1291.2
  Bottom Layer w10: S3.E 2122,1197 2488.12,1197 S+.E 2598.54,1161.42 R3+T.1 2706.69,1161.42 2819,1049.11 2819,806 U1.30
IRS6-: R6-T.1 S6.E S-.E U1.34 | length 1169
  Bottom Layer w10: S6.E 2091.12,866 2517.12,866 S-.E 2603.32,862.2 R6-T.1 2706.69,862.2 2817.74,751.15 2817.74,607.26 U1.34
IRS9x: R9xT.1 S9.E Sx.E U1.35 | length 1127.4
  Bottom Layer w10: S9.E 2117.12,592 2484.12,592 Sx.E 2609.17,559.06 R9xT.1 2755.94,559.06 2866,449 2976,449 U1.35
IRS12: R12T.1 S1.E S2.E U1.51 | length 1313.5
  Bottom Layer w10: U1.51 725,1400 R12T.1 772.63,1149.37 848,1074 992.12,1074 S1.E 1120.12,1202 1446.24,1202 S2.E
IRS45: R45T.2 S4.E S5.E U1.53 | length 1530.6
  Bottom Layer w10: U1.53 635.89,1389.11 635.89,1357.65 673.46,1320.07 673.46,885.91 724.41,834.96 724.41,829.06 739.09,814.37 R45T.2 814.63,814.37 859,770 991.12,770 S4.E 1123.12,902 1442.12,902 S5.E
IRS78: R78T.1 S7.E S8.E U1.62 | length 1649.4
  Bottom Layer w10: U1.62 462,937 462,574 487.54,548.46 675,548.46 739.09,484.37 R78T.1 801.63,484.37 818,468 988.12,468 S7.E 1117.12,597 1453.12,597 S8.E
IRSequaldivide: RequaldivideT.1 Sdivide.E Sequal.E U1.37 | length 1130.2
  Bottom Layer w10: Sequal.E 2135.12,300 2472.12,300 Sdivide.E 2643.52,287.4 RequaldivideT.1 2706.69,287.4 2744.09,250 2985,250 3025,290 U1.37
NetDSch_2: DSch.2 LFB.1 UBuck.2 | length 1197.4
  Bottom Layer w20: DSch.2@2427.19,1695 2427.19,1786.81
  Bottom Layer w40: UBuck.2@1658.19,2005.93 2208.07,2005.93 2427.19,1786.81 LFB.1
NetF8V_1: F8V.1 J.1 | length 1602.8
  Bottom Layer w10: F8V.1@3070.87,2295.87 F8V.1
  Bottom Layer w80: F8V.1@3070.87,2295.87 3145,2221.73 3145,772 J.1@3160,757
NetFAn_1: FAn.1 RFAnin.1 | length 120.8
  Top Layer w10: FAn.1 2062.68,2140 RFAnin.1
NetFAn_3: FAn.3 RFAnGND.2 RFAnLCD.1 | length 255.4
  Top Layer w10: RFAnLCD.1 2057.13,2417.76 FAn.3 2057.2,2315.63 RFAnGND.2
NetFVO_1: FVO.1 RFVOin.1 | length 129.2
  Top Layer w10: FVO.1 920.55,2373.07 934.25,2359.37 RFVOin.1
NetFVO_3: FVO.3 RFETVOLCD.1 RFVOGND.2 | length 246.6
  Top Layer w10: RFVOGND.2 629.37,2275.91 610,2295.28 RFETVOLCD.1 725.75,2360.63 739.45,2374.33 FVO.3
NetR0D_2: R0D.2 S0.A | length 161.6
  Top Layer w10: R0D.2 889.13,245.63 S0.A
NetR1D_1: R1D.1 S1.A | length 200.6
  Top Layer w10: R1D.1 795.91,1260.63 928.88,1127.65 S1.A
NetR2D_2: R2D.2 S2.A | length 160.4
  Top Layer w10: R2D.2 1354.37,1056.37 S2.A
NetR3D_2: R3D.2 S3.A | length 145
  Top Layer w10: R3D.2 1790.63,1120 S3.A
NetR4D_2: R4D.2 S4.A | length 180.8
  Top Layer w10: R4D.2 843.25,905.63 S4.A
NetR5D_2: R5D.2 S5.A | length 161.5
  Top Layer w10: R5D.2@1284,749.37 1351.25,749.37 S5.A
NetR6D_2: R6D.2 S6.A | length 179.8
  Top Layer w10: R6D.2 1850.51,904.37 S6.A
NetR7D_2: R7D.2 S7.A | length 165.9
  Top Layer w10: R7D.2 879.25,570.63 S7.A
NetR8D_2: R8D.2 S8.A | length 167.2
  Top Layer w10: R8D.2 1344.25,444.37 S8.A
NetR9D_2: R9D.2 S9.A | length 179.8
  Top Layer w10: R9D.2 1850.51,604.37 S9.A
NetR+D_2: R+D.2 S+.A | length 220.2
  Top Layer w10: R+D.2 2315.91,965.63 2443.76,1093.48 2443.76,1116.87 S+.A
NetR-D_2: R-D.2 S-.A | length 171.6
  Top Layer w10: R-D.2 2380.25,749.37 S-.A
NetRdivideD_2: RdivideD.2 Sdivide.A | length 166.1
  Top Layer w10: RdivideD.2 2407.3,161.42 Sdivide.A
NetRdotD_2: RdotD.2 Sdot.A | length 155.9
  Top Layer w10: RdotD.2 1290.91,154.37 1341.54,205 Sdot.A
NetRequalD_2: RequalD.2 Sequal.A | length 186
  Top Layer w10: RequalD.2 1835.51,309.37 Sequal.A
NetRxD_2: RxD.2 Sx.A | length 178.9
  Top Layer w10: RxD.2 2372.95,433.07 Sx.A
NetS0_3: S0.C Tr0.2 | length 242.4
  Top Layer w10: S0.C 1158.6,223.6 Tr0.2
NetS1_3: S1.C Tr1.2 | length 232
  Top Layer w10: S1.C 1161.6,1143.48 Tr1.2
NetS2_3: S2.C Tr2.2 | length 144.1
  Top Layer w10: S2.C 1631.18,1020 1652.6,1041.42 Tr2.2
NetS3_3: S3.C Tr3.2 | length 235.1
  Top Layer w10: S3.C 2172.6,1147.6 Tr3.2
NetS4_3: S4.C Tr4.2 | length 228.6
  Top Layer w10: S4.C 1161.6,840.48 Tr4.2
NetS5_3: S5.C Tr5.2 | length 143.8
  Top Layer w10: S5.C 1632.18,716 1652.6,736.42 Tr5.2
NetS6_3: S6.C Tr6.2 | length 190.5
  Top Layer w10: S6.C 2045.12,723.94 2153.8,832.62 2153.8,854.45 Tr6.2
NetS7_3: S7.C Tr7.2 | length 222.6
  Top Layer w10: S7.C 1161.6,541.48 Tr7.2
NetS8_3: S8.C Tr8.2 | length 144.2
  Top Layer w10: S8.C 1626.18,420 1652.6,446.42 Tr8.2
NetS9_3: S9.C Tr9.2 | length 226.2
  Top Layer w10: S9.C 2167.32,542.2 Tr9.2
NetS+_3: S+.C Tr+.2 | length 216.5
  Top Layer w10: S+.C 2761.89,1024 2769.68,1031.8 Tr+.2
NetS-_3: S-.C Tr-.2 | length 211.4
  Top Layer w10: S-.C 2761.89,721 2769.68,728.8 Tr-.2
NetSdivide_3: Sdivide.C Trdivide.2 | length 240.6
  Top Layer w10: Sdivide.C 2704.18,108 2767.6,171.42 Trdivide.2
NetSdot_3: Sdot.C Trdot.2 | length 154.5
  Top Layer w10: Sdot.C 1607.36,182.24 Trdot.2
NetSequal_3: Sequal.C Trequal.2 | length 240.9
  Top Layer w10: Sequal.C 2046.73,111.61 2046.73,148.62 2161.73,263.62 2161.73,301.38 Trequal.2
NetSx_3: Sx.C Trx.2 | length 208.8
  Top Layer w10: Sx.C 2764.3,413 Trx.2
RS: LCD2x16.4 U1.39 | length 939.3
  Top Layer w10: U1.39 500,2225 500,2590 512.17,2602.17 823.74,2602.17 865.9,2560.01 LCD2x16.4@874.99,2560.01
RW: LCD2x16.5 U1.40 | length 1048.6
  Top Layer w10: U1.40 525,2171.72 480,2216.72 480,2600 502.17,2622.17 903.74,2622.17 965.9,2560.01 LCD2x16.5@974.99,2560.01
Signal1: Tr0.1 Tr1.1 Tr4.1 Tr7.1 Tr+.1 Tr-.1 Trdivide.1 Trx.1 U1.55 | length 5229.5
  Top Layer w10: U1.55 745,1420 v1(797,1420) 799.57,1420 826.57,1393 2672,1393 2844.49,1220.51 Tr+.1 Tr-.1 Trx.1 2843.44,417.34 2843.44,183.29 Trdivide.1 ; v1@1186,707 v1(1186.5,707) 1187,707 1236.4,657.6 Tr7.1 1236.4,581.42 1276.82,541 v1(1277,541) ; v1(1187,1003) 1236.4,953.6 Tr4.1 1236.4,886.42 1287.82,835 v1(1290,835) ; v1(1191,400) 1233.4,357.6 Tr0.1 Tr0.1@1234.9,299.74 ; v1@1285,1144 v1(1283.82,1144) 1236.4,1191.42 Tr1.1 1236.4,1213.07 1244.2,1220.87 1275.87,1220.87 1306,1251 v1(1315,1251)
  Bottom Layer w10: v1(797,1420) 1146,1420 v1(1315,1251) ; v1(1186.5,707) 1290,810.5 v1(1290,835) ; v1(1187,1003) 1193.64,1009.64 1193.64,1053.82 v1(1283.82,1144) ; v1(1191,400) 1277,486 v1(1277,541)
Signal2: Tr2.1 Tr3.1 Tr5.1 Tr6.1 Tr8.1 Tr9.1 Trdot.1 Trequal.1 U1.25 | length 3244.4
  Top Layer w10: v1(1689,550) 1727.4,511.6 Tr8.1 1727.4,446.42 1776.82,397 v1(1784,397) ; v1(1689,853) 1727.4,814.6 Tr5.1 1727.4,736.42 1735.2,728.62 1760.38,728.62 v1(1794,695) ; v1(1697,261) 1727.4,230.6 Trdot.1 ; Tr2.1 1727.4,1041.42 1777.82,991 v1(1780,991) ; v1(2203,390) 2237.4,355.6 Trequal.1 ; v1(2204,980) 2236.4,947.6 Tr6.1 2265.76,862.24 v1(2303,825) ; v1(2214,686) 2242.13,657.87 Tr9.1 2242.13,584.72 2296,530.85 v1(2296,524) ; Tr3.1 2247.4,1191.42 2301,1137.82 v1(2301,1137) 2435,1271 v1(2564.17,1271)
  Bottom Layer w10: v1(1689,550) 1794,655 v1(1794,695) ; v1(1689,853) 1780,944 v1(1780,991) ; v1(1697,261) 1784,348 v1(1784,397) ; v1(2203,390) 2296,483 v1(2296,524) ; v1(2204,980) 2301,1077 v1(2301,1137) ; v1(2214,686) 2303,775 v1(2303,825) ; v1(2564.17,1271) 2657.69,1271 2875,1053.69 2875,981.46 2902.46,954 2906,954 2911.54,948.46 2976.54,948.46 U1.25
VO: LCD2x16.3 RFETVOLCD.2 | length 215
  Top Layer w10: RFETVOLCD.2 624.69,2454.06 669.04,2454.06 LCD2x16.3@774.99,2560.01
VOPWM: RFVOin.2 U1.54 | length 1315.9
  Top Layer w10: U1.54 460,1465 460,1920 490.01,1950.01 567.75,1950.01 784,1950 1030,2196 RFVOin.2
pads on no net: LCD2x16. U1.0 U1.5 U1.7 U1.9 U1.10 U1.11 U1.12 U1.13 U1.14 U1.15 U1.16 U1.17 U1.18 U1.24 U1.26 U1.27 U1.28 U1.29 U1.31 U1.32 U1.33 U1.36 U1.38 U1.45 U1.46 U1.48 U1.49 U1.50 U1.52 U1.56 U1.57 U1.59 U1.60 U1.61 U1.63 U1.64 U1.65 U1.66 U1.67 U1.68 U1.69 U1.70 U1.71 U1.73 U1.74 U1.75 U1.76 UBuck.6

## Polygon pours and split planes (outlines as drawn)
GND on Top Layer "GND_L01_P000" (solid, remove dead copper, pour order 0): 14,2695 18,2691 18,22 3533,22 3540,29 3529,40 3529,2695 18,2695
GND on Bottom Layer "GND_L02_P001" (solid, remove dead copper, pour order 1): 56,2646 41,2631 41,55 3507,55 3502,60 3502,2672 67,2672 51,2656

## Keep-outs
Keep-Out Layer:
  the board outline again, w78.74

## Other copper
Top Layer:
  text "Hanics Mihaly Peter UJ47SY" at 205,405 h60 r90
Bottom Layer:
  text "Hanics Mihaly Peter" at 151,375 h60 r270

## Silkscreen, mask and mechanical layers (free items; w line width, h text height)
Mechanical 1:
  the board outline again, w10

## Text inside footprints (layer, text, board x,y; h text height)
U1: Bottom Overlay "CN10" at 675,2170 h40; Bottom Overlay "CN7" at 3060,2171 h40